# Altium PCB tachometer.PcbDoc
Units mil, origin at the board's own origin, x right, y up, seen from the top; angles counter-clockwise.
Board outline 2220.03 x 1120.03 mil, 2 copper layers (Top Layer, Bottom Layer); 14 components, 11 nets, 34 pads, 2 vias.
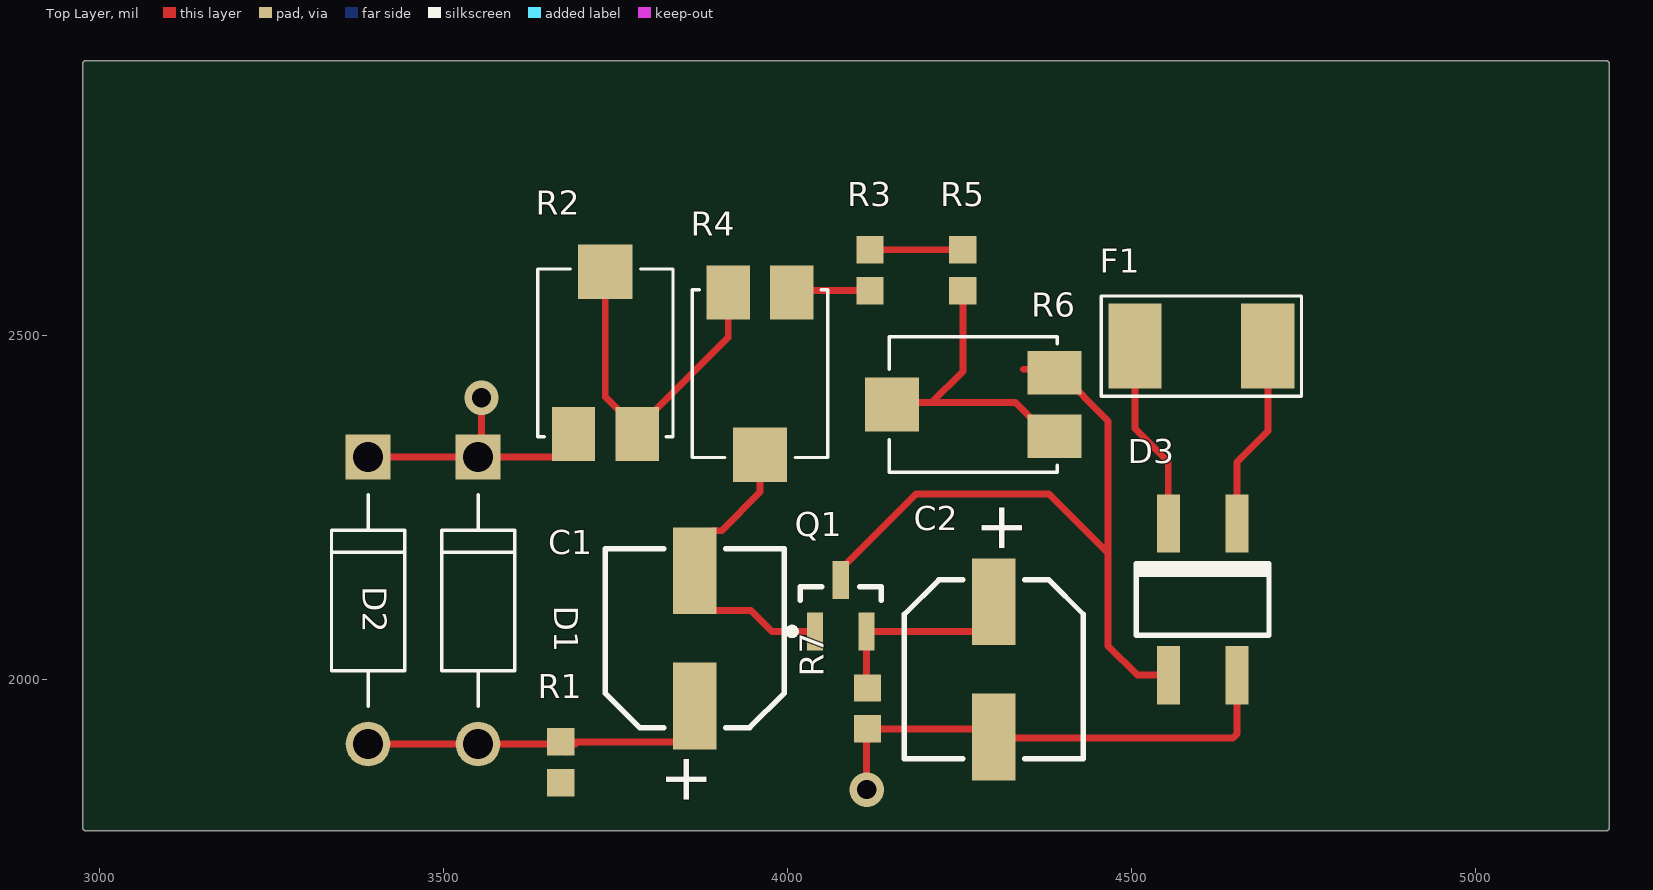
[diagram p0: Top Layer view]
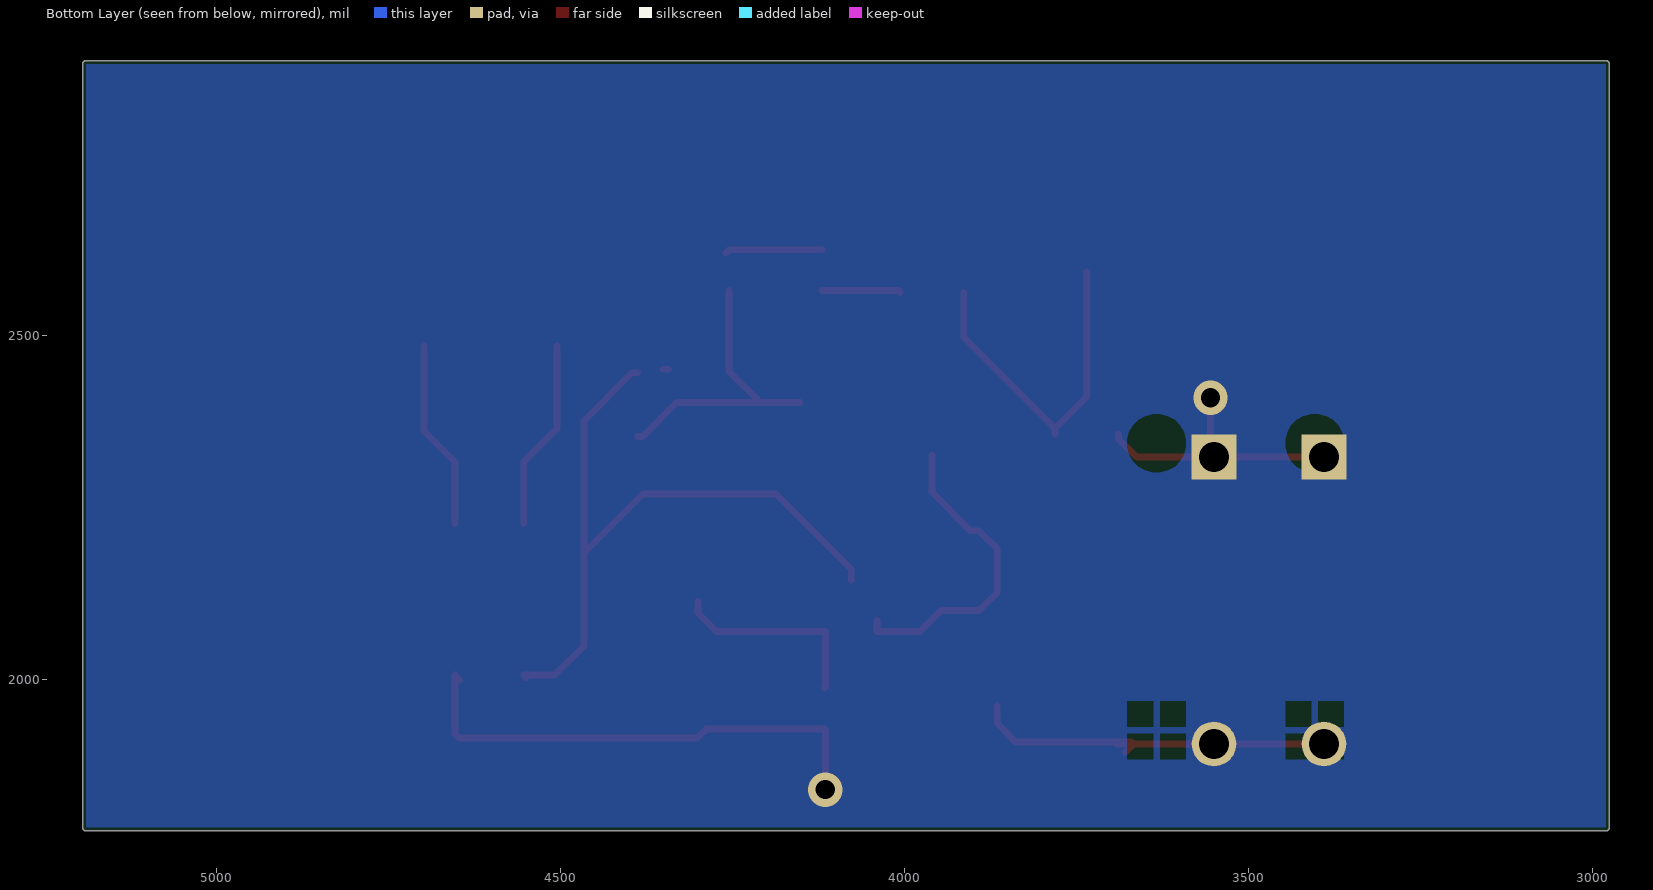
[diagram p1: Bottom Layer view, seen from below]

## Layer stack, top to bottom
Top Solder: solder mask 0.4, Solder Resist, Dk 3.5
Top Layer: signal copper 1.4
Dielectric 1: dielectric 12.6, FR-4, Dk 4.8
Bottom Layer: signal copper 1.4
Bottom Solder: solder mask 0.4, Solder Resist, Dk 3.5

## Board outline
2974.99,1785 ccw(c2980,1785) 2980,1779.98 5190,1779.98 ccw(c5190,1785) 5195.02,1785 5195.02,2895 ccw(c5190,2895) 5190,2900.01 2980,2900.01 ccw(c2980,2895) 2974.99,2895

## Design rules (kind name [scope] priority, off if disabled: settings)
Clearance [All] p1: gap=10 ignorepadtopadclearanceinfootprint=FALSE except(0: Arc-Hole Track-Hole SMDPad-Hole THPad-Hole Via-Hole Fill-Hole Poly-Hole Region-Hole Text-Hole)
PolygonConnect [All] p1: connectstyle=Relief reliefconductorwidth=10 reliefentries=4 polygonreliefangle="90 Angle" airgapwidth=10
RoutingVias [All] p1: holewidth=28 width=50 viastyle="Through Hole" minholewidth=28 minwidth=50 maxholewidth=28 maxwidth=50
SolderMaskExpansion [All] p1: expansion=4 istentingtop=FALSE
Width [All] p1: maxlimit=10 minlimit=10 preferedwidth=10
30 further rules are at their usual default settings.

## Classes and differential pairs
component class tachometer: C2 D1 D2 D3 F1 Q1 R1 R2 R3 R4 R5 R6 R7

## Components (designator, comment, footprint, x,y, rotation, side; value= is the part's Value field where it differs from the comment)
C1 "1uF" CAPAE660X660R_PAN 3865,2060 r90 top
C2 "100nF" CAPAE660X660R_PAN 4300,2015 r270 top
D1 "1N4007" DIOAD1060W80L520D270 3550,2115 r270 top
D2 "1N4007" DIOAD1060W80L520D270 3390,2115 r270 top
D3 "1A/60V" SOIC127P670X270-8N_MCC 4601.65,2095 r0 top
F1 "1mA FSD" NANO-452_LIT 4601.65,2485 r0 top
Q1 "BC107" SOT95P230X110-3N_PHY 4077.4,2107.4 r90 top
R1 "10k" RESC1508X05R_VIS 3670,1879.72 r90 top
R2 "1k" TRIM_ST4ETB503_COP 3735,2475 r0 top
R3 "1k" RESC1508X05R_VIS 4120,2595.28 r90 top
R4 "50K" TRIM_ST4ETB503_COP 3960,2445 r180 top
R5 "1k" RESC1508X05R_VIS 4255,2595.28 r90 top
R6 "10k" TRIM_ST4ETB503_COP 4270,2400 r90 top
R7 "1k" RESC1508X05R_VIS 4116.26,1958.11 r270 top

## Footprints (in the part's own frame and the unit in brackets; to place one, negate y for a bottom-side part, rotate by r counter-clockwise, add the part's x,y. Pads: shape width x height; smd on the part's side, far side on the other; paste and mask are expansions set on the pad)
CAPAE660X660R_PAN [mm] "Molded Capacitor, 2-Leads, Body 6.3x6.3mm, Manufacturer Recommendation"
  rect 3.2x1.6 smd: 1(-2.5,0) 2(2.5,0)
  silkscreen extent -3.3,-3.3 3.3,3.3, body extent -3.3,-3.3 3.3,3.3, height 7.7
DIOAD1060W80L520D270 [mm]
  round 1.65 hole 1.1: A(5.3,0)
  rect 1.65x1.65 hole 1.1: C(-5.3,0)
  silkscreen extent -3.9,-1.35 3.9,1.35
NANO-452_LIT [mm] "Fuse 6.1X2.69X2.69. Recommended pad"
  rect 1.96x3.15 smd: 1(-2.455,0) 2(2.455,0)
  silkscreen extent -3.7,-1.85 3.7,1.85, body extent -3.05,-1.34 3.05,1.34, height 2.69
RESC1508X05R_VIS [mm] "Chip Resistor, 2-Leads, Body 1,5x0,8mm, Recommendated"
  rect 1.01x1.01 smd: 1(-0.755,0) 2(0.755,0)
  body extent -0.88,-0.51 0.88,0.51, height 0.46
SOIC127P670X270-8N_MCC [mm] "SOIC, 8-Leads, Body 4,9x4,2mm (max), Pitch 1,27mm, IPC Medium Density"
  rect 0.85x2.15 smd: 1(1.32,3.35) 2(1.32,-2.25) 3(-1.22,3.35) 4(-1.22,-2.25)
  silkscreen extent -2.4,-0.78 2.5,1.87, body extent -2.42,-1.55 2.52,2.65, height 2.7
SOT95P230X110-3N_PHY [mm] "SOT23, 3-Leads, Body 3,0x2,5mm (max), Pitch 0,95mm, IPC Medium Density"
  rect 1.4x0.6 smd: 1(-0.95,0.95) 2(-0.95,-0.95) 3(0.95,0)
  silkscreen extent -1.07,-1.5 0.7,1.92, body extent -0.7,-1.5 0.7,1.5, height 1.1
TRIM_ST4ETB503_COP [mm] "5mm Square Trimming Potenciometer"
  rect 1.6x2 smd: 1(-1.175,-3) 2(1.175,-3)
  rect 2x2 smd: 3(0,3)
  silkscreen extent -2.5,-3.1 2.5,3.1, body extent -2.5,-3.1 2.5,3.1, height 2.36

## Part data
C1 C2: library part 100uF_EEE-TQV101XAP_PAN, "CAP ALUM 100UF 35V 20% SMD", Manufacturer_A=PANASONIC, Package_A=D8, PartNumber_A=EEE-TQV101XAP, Value_A=100uF/35V, ComponentLink1Description=Datasheet, ComponentLink1URL=DATASHEETS\TP.PDF
D1 D2: "Diode Standard 1000V 1A Through Hole DO-204AL _DO-41_", Package="DO-41 Good-Ark", Availability=Unavailable, MF="ON Semiconductor", MP=1N4007, Price=None, SnapEDA_Link=https://www.snapeda.com/parts/1N4007/ON%20Semiconductor/view-part/2816213/?ref=snap
D3: library part MB16S-TP_MCC, "DIODE SCHOTTKY 1A 60V MBS-1", Manufacturer_A="MICRO COMERCIAL", Package_A="MBS-1, 4-SOIC", PartNumber_A=MB16S-TP, ComponentLink1Description=Datasheet, ComponentLink1URL=DATASHEETS\MB16S.PDF, Value_A=1A/60V
F1: library part 2A_0452002.MRL_LIT, "FUSE BOARD MNT 2A 125VAC/VDC SMD", Manufacturer_A=LITTELFUSE, PartNumber_A=0452002.MRL, Value_A=2A/125V, ComponentLink1Description=Datasheet, ComponentLink1URL=DATASHEETS\NANO.pdf
Q1: library part BC817_SOT23, Manufacturer_A=PHYLIPS, Package_A=SOT23, PartNumber_A=BC817, ComponentLink1Description=Datasheet, ComponentLink1URL=DATASHEETS\BC817.pdf
R1 R3 R5 R7: library part WSL0603R0150FEA_VIS, "POWER METAL STRIP RESISTOR 0.1W 1%", Manufacturer_A=VISHAY, Package_A=0603, PartNumber_A=WSL0603R0150FEA, Value_A=15mohm/1%, ComponentLink1Description=Datasheet, ComponentLink1URL=DATASHEETS\WSL.PDF
R2 R4 R6: library part 5K_ST4ETB502_COP, "TRIMMER 5K OHM 0.25W SMD", Manufacturer_A=COPAL, Package_A=5X4.4X2.3mm, PartNumber_A=ST4ETB502, Value_A=5K/20%, ComponentLink1Description=Datasheet, ComponentLink1URL=DATASHEETS\ST4.PDF, ComponentLink2URL=APP_NOTES\XXXX.PDF

## Via types
v1: diameter 50, hole 28, Top Layer to Bottom Layer, 2 vias

## Nets (pads, with @x,y where several pads share a name; then routed paths per layer and width w, separated by ;. In a path a pad name is that pad's centre, name@x,y a point inside that pad or via, vN(x,y) a via of type N, cw(c..) or ccw(c..) an arc to the next point about the centre after c; other vN are vias at no path point)
+12: R3.2 R5.2 | length 141.7
  Top Layer w10: R3.2 R5.2 R5.2@4259.72,2620.28
GND: C2.2 D1.C D2.C D3.2 R2.1 R7.2 | length 1139.7
  Top Layer w10: D2.C@3386.34,2320 D2.C D1.C ; v1(3555,2410) 3555,2328.66 D1.C ; R2.1 3688.74,2350.16 3662.24,2323.66 D1.C ; v1(4115,1840) 4115,1927.13 R7.2 4288.19,1928.39 C2.2 4301.57,1915 4647.76,1915 4653.62,1920.86 D3.2 D3.2@4646.65,1999.45
NetC1_1: C1.1 D1.A D2.A R1.2 | length 550.1
  Top Layer w10: D2.A R1.2@3666.89,1906.34 ; R1.2 3838.5,1909.45 3865,1935.94 C1.1 ; R1.2@3678.66,1894.57 R1.2@3666.89,1906.34 ; 3691.89,1906.34 R1.2@3666.89,1906.34
NetC1_2: C1.2 Q1.1 R4.3 | length 460.9
  Top Layer w10: R4.3 3960,2272.52 3903.9,2216.42 3891.5,2216.42 3865,2189.92 C1.2 3865,2126.93 3891.5,2100.43 3947.13,2100.43 3977.56,2070 Q1.1 Q1.1@4040,2085.75
NetC2_1: C2.1 Q1.2 R7.1 | length 295.9
  Top Layer w10: R7.1 4114.8,1989.29 Q1.2 4273.5,2070 4300,2096.5 C2.1
NetD3_1: D3.1 F1.2 | length 276.8
  Top Layer w10: D3.1 4653.62,2316.34 4698.54,2361.26 4698.54,2484.76 F1.2
NetD3_3: D3.3 F1.1 | length 278.3
  Top Layer w10: F1.1 4505,2364.8 4553.62,2316.18 D3.3
NetD3_4: D3.4 Q1.3 R6.2 | length 1037.7
  Top Layer w10: Q1.3 4077.4,2160.55 4186.85,2270 4380,2270 4466.26,2183.74 ; 4343.11,2451.26 R6.2@4350.98,2451.26 ; R6.2 4395.98,2446.26 4466.26,2375.98 4466.26,2183.74 ; D3.4@4550.24,2003.03 D3.4 4508.58,2006.42 4466.26,2048.74 4466.26,2183.74
NetR2_2: R2.2 R2.3 R4.2 | length 508.6
  Top Layer w10: R2.3 3735,2411.02 R2.2@3781.26,2364.76 ; R2.2 R2.2@3781.26,2364.76 ; R4.2 3913.74,2497.24 R2.2@3781.26,2364.76
NetR3_1: R3.1 R4.1 | length 114.8
  Top Layer w10: R4.1 4008.7,2565.55 R3.1
NetR5_1: R5.1 R6.1 R6.3 | length 438.2
  Top Layer w10: R6.3@4151.89,2402.73 4209.47,2402.73 ; R5.1 4255,2448.27 4209.47,2402.73 ; R6.1 4380.24,2353.74 4331.24,2402.73 4209.47,2402.73
pads on no net: R1.1

## Polygon pours and split planes (outlines as drawn)
GND on Bottom Layer "GND_L02_P000" (solid, pour order 0): 2980,2895 5190,2895 5190,1785 2980,1785

## Text inside footprints (layer, text, board x,y; h text height)
C1: Top Overlay "+" at 3905,1815 h118.11 r90
C2: Top Overlay "+" at 4260,2260 h118.11 r270